# EAGLE board TSOC_GROVEY_GPIO (EAGLE 6.6.0)
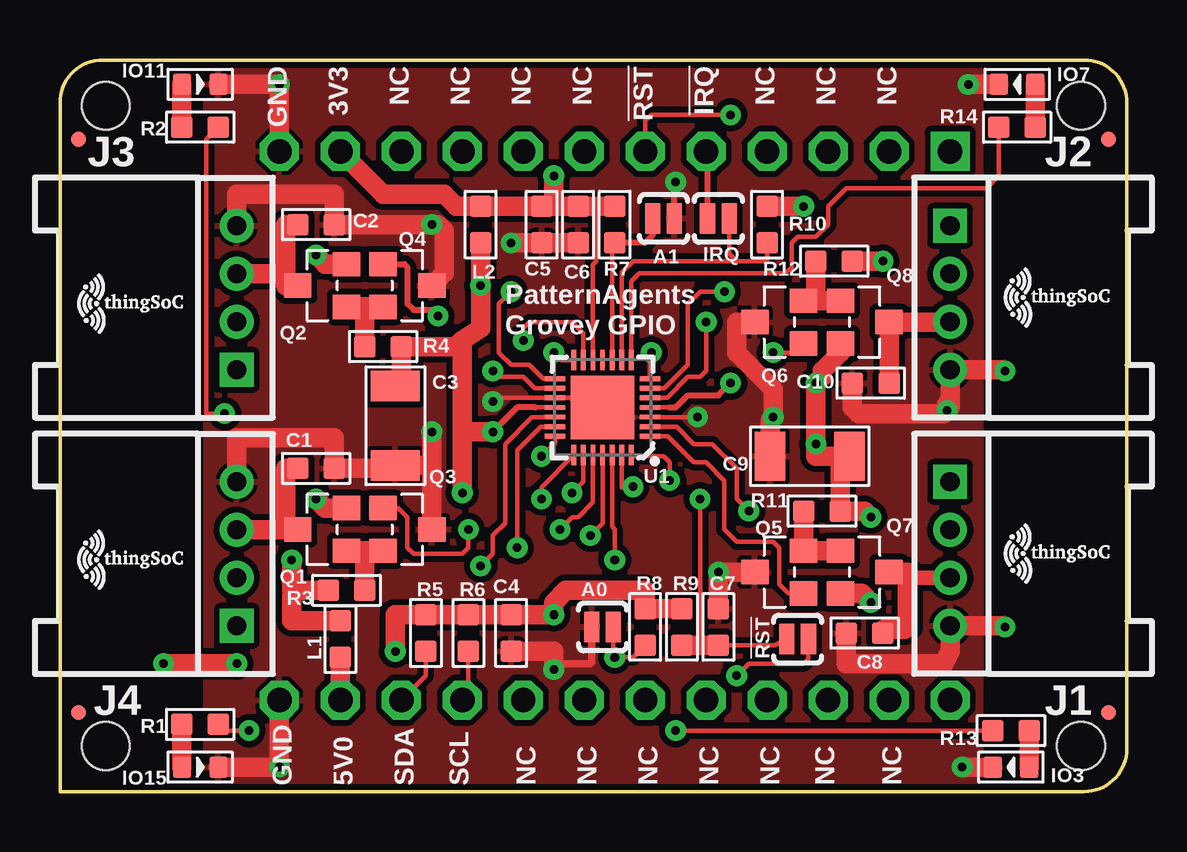
[diagram p0: board, top side]
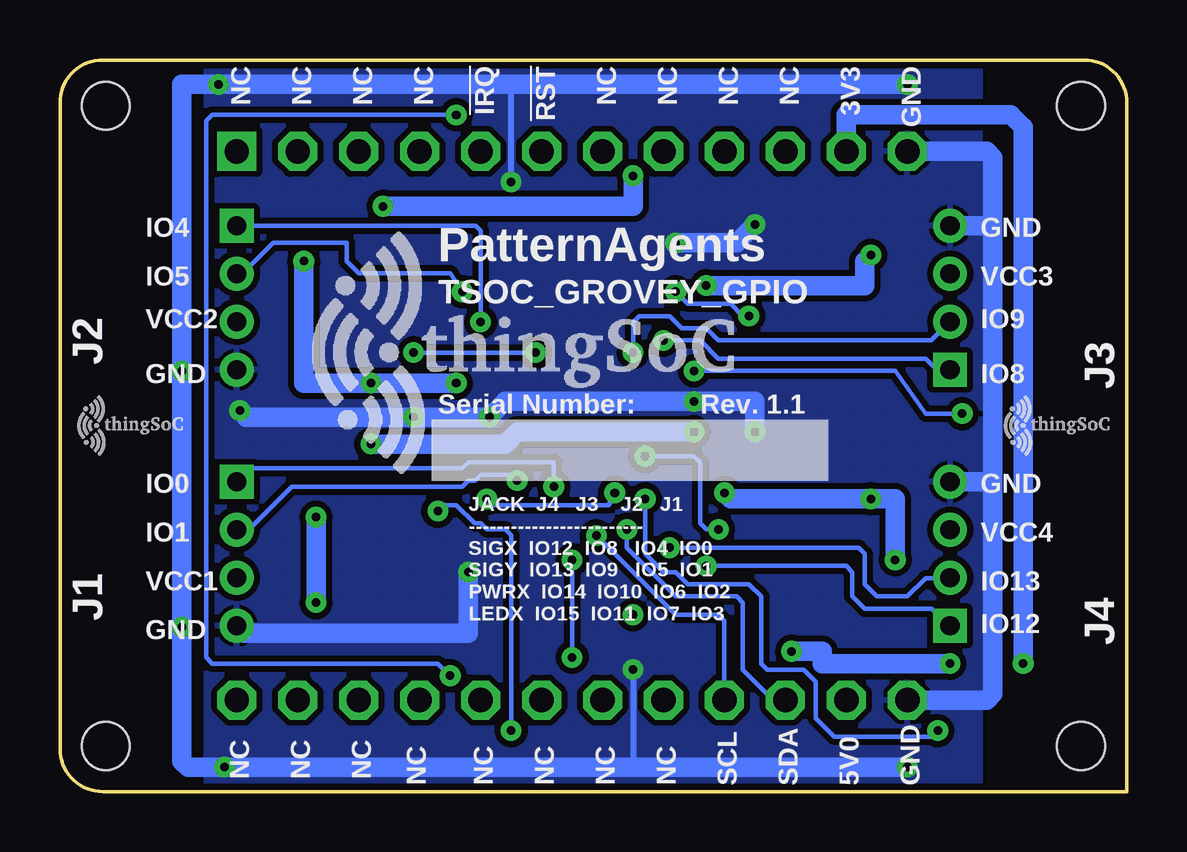
[diagram p1: board, bottom side, seen from below]

Size 44.45 x 30.48 mm. Coordinates in mm from the lower left corner, seen from the top.
Copper layers (1*16): Top 0.035mm / dielectric 1.5mm / Bottom 0.035mm
Design rules "PatternAgents_7mil": minimum track width 7mil, minimum drill 14mil, track to track 7mil, track to pad 7mil, pad to pad 7mil, via to via 7mil, smd to smd 7mil, copper to edge 7mil, drill to drill 7mil, minimum pad ring 12mil, minimum via ring 10mil, stop-mask expansion 4mil, vias tented up to drill 25mil, thermal gap 7mil

## Footprints (pad centres in the part's own frame; a part is rotated, then mirrored left to right if it is on the bottom)
JMP-2-NO = smd 0.635 x 1.27: 1 -0.45,0; 2 0.45,0
C0603 = smd 0.889 x 0.889: 1 0,0.762; 2 0,-0.762
C1206 = smd 1.27 x 2.032: 1 -1.651,0; 2 1.651,0
MICRO-FIDUCIAL = smd 0.635 x 0.635: 1 0,0
LED-0603 = smd 0.762 x 0.889: + -0.762,0; - 0.762,0
HW4-2.0-90D = drill 0.8 pad 1.27 square: 1 -3,0 | drill 0.8 pad 1.27: 2 -1,0; 3 1,0; 4 3,0
L0603 = smd 0.889 x 0.889: 1 -0.762,0; 2 0.762,0
SOT-23 = smd 1.016 x 1.143: 1 -0.889,-1.016; 2 0.889,-1.016; 3 0,1.016
R0603 = smd 0.889 x 0.889: 1 0,0.762; 2 0,-0.762
TSOC-BB-S24 = drill 1.016 square: 1B -11.43,11.43 | drill 1.016 octagon: 1C 11.43,11.43; 2B -11.43,8.89; 2C 11.43,8.89; 3B -11.43,6.35; 3C 11.43,6.35; 4B -11.43,3.81; 4C 11.43,3.81; 5B -11.43,1.27; 5C 11.43,1.27; 6B -11.43,-1.27; 6C 11.43,-1.27; 7B -11.43,-3.81; 7C 11.43,-3.81; 8B -11.43,-6.35; 8C 11.43,-6.35; 9B -11.43,-8.89; 9C 11.43,-8.89; 10B -11.43,-11.43; 10C 11.43,-11.43; 11B -11.43,-13.97; 11C 11.43,-13.97; 12B -11.43,-16.51; 12C 11.43,-16.51
QFN-28 = smd 0.85 x 0.2: 1 -1.975,1.2; 2 -1.975,0.8; 3 -1.975,0.4; 4 -1.975,0; 5 -1.975,-0.4; 6 -1.975,-0.8; 7 -1.975,-1.2; 15 1.975,-1.2; 16 1.975,-0.8; 17 1.975,-0.4; 18 1.975,0; 19 1.975,0.4; 20 1.975,0.8; 21 1.975,1.2 | smd 0.2 x 0.85: 8 -1.2,-1.975; 9 -0.8,-1.975; 10 -0.4,-1.975; 11 0,-1.975; 12 0.4,-1.975; 13 0.8,-1.975; 14 1.2,-1.975; 22 1.2,1.975; 23 0.8,1.975; 24 0.4,1.975; 25 0,1.975; 26 -0.4,1.975; 27 -0.8,1.975; 28 -1.2,1.975 | smd 2.65 x 2.65: 29 0,0
TSOC-BB-BRD-DIM = hole 2: 13.335,16.891; -13.335,16.891; 13.335,-23.749; -13.335,-23.749

## Placement (x,y rotation side)
!RST  NO  [JMP-2-NO]  30.73,6.35 0 top
$$U$4  TSOC-LOGO-SMALL  [TSOC-LOGO-SML]  40.13,9.91 0 top
$$U$5  TSOC-LOGO-SMALL  [TSOC-LOGO-SML]  40.13,20.57 0 top
A0  NO  [JMP-2-NO]  22.61,6.86 0 top
A1  NO  [JMP-2-NO]  25.15,23.88 180 top
C1  1uf  [C0603]  10.67,13.46 270 top
C2  1uf  [C0603]  10.67,23.62 270 top
C3  100uf  [C1206]  13.97,15.24 90 top
C4  1uf  [C0603]  18.8,6.6 180 top
C5  100nf  [C0603]  20.07,23.62 0 top
C6  1uf  [C0603]  21.59,23.62 180 top
C7  100nf  [C0603]  27.43,6.86 180 top
C8  1uf  [C0603]  33.53,6.6 90 top
C9  100uf  [C1206]  31.24,13.97 0 top
C10  1uf  [C0603]  33.78,17.02 90 top
FID1  FIDUCIALUFIDUCIAL  [MICRO-FIDUCIAL]  0.76,3.3 0 top
FID2  FIDUCIALUFIDUCIAL  [MICRO-FIDUCIAL]  0.76,27.18 0 top
FID3  FIDUCIALUFIDUCIAL  [MICRO-FIDUCIAL]  43.69,3.3 0 top
FID4  FIDUCIALUFIDUCIAL  [MICRO-FIDUCIAL]  43.69,27.18 0 top
IO3  BLUE-0603  [LED-0603]  39.62,1.02 180 top
IO7  RED-0603  [LED-0603]  39.88,29.46 180 top
IO11  GREEN-0603  [LED-0603]  5.84,29.46 0 top
IO15  YELLOW-0603  [LED-0603]  5.84,1.02 0 top
IRQ  NO  [JMP-2-NO]  27.43,23.88 0 top
J1  4P-2.0-90D  [HW4-2.0-90D]  37.08,9.91 270 top
J2  4P-2.0-90D  [HW4-2.0-90D]  37.08,20.57 270 top
J3  4P-2.0-90D  [HW4-2.0-90D]  7.37,20.57 90 top
J4  4P-2.0-90D  [HW4-2.0-90D]  7.37,9.91 90 top
L1  120OHM-500MA  [L0603]  11.68,6.35 270 top
L2  DNP  [L0603]  17.53,23.62 270 top
Q1  CJ2305  [SOT-23]  10.92,10.92 90 top
Q2  CJ2305  [SOT-23]  10.92,21.08 90 top
Q3  BSS138W-7-F  [SOT-23]  14.48,10.92 270 top
Q4  BSS138W-7-F  [SOT-23]  14.48,21.08 270 top
Q5  BSS138W-7-F  [SOT-23]  29.97,9.14 90 top
Q6  BSS138W-7-F  [SOT-23]  29.97,19.56 90 top
Q7  CJ2305  [SOT-23]  33.53,9.14 270 top
Q8  CJ2305  [SOT-23]  33.53,19.56 270 top
R1  1K 1/10W  [R0603]  5.84,2.79 90 top
R2  1K 1/10W  [R0603]  5.84,27.69 90 top
R3  47K  [R0603]  11.94,8.38 270 top
R4  47K  [R0603]  13.46,18.54 90 top
R5  10K 1/10W  [R0603]  15.24,6.6 180 top
R6  10K 1/10W  [R0603]  17.02,6.6 180 top
R7  10K 1/10W  [R0603]  23.11,23.62 180 top
R8  10K 1/10W  [R0603]  24.38,6.86 180 top
R9  10K 1/10W  [R0603]  25.91,6.86 180 top
R10  10K 1/10W  [R0603]  29.46,23.62 180 top
R11  47K  [R0603]  31.75,11.68 90 top
R12  47K  [R0603]  32.26,22.1 90 top
R13  1K 1/10W  [R0603]  39.62,2.54 270 top
R14  1K 1/10W  [R0603]  39.88,27.69 270 top
TSOC  TSOC-24-BB  [TSOC-BB-S24]  25.65,15.24 270 top
U1  SX1509  [QFN-28]  22.61,16 180 top
U$1  TSOC-LOGO-SMALL  [TSOC-LOGO-SML]  1.52,9.65 0 top
U$2  TSOC-LOGO-SMALL  [TSOC-LOGO-SML]  1.52,20.32 0 top
U$3  TSOC-PCB-SINGLE  [TSOC-BB-BRD-DIM]  25.65,15.24 270 top
U$100  TSOC-LOGO-SMALL  [TSOC-LOGO-SML]  4.32,15.24 0 bottom
U$101  TSOC-LOGO-LRG  [TSOC-LOGO-LRG]  30.73,18.29 0 bottom
U$102  TSOC-LOGO-SMALL  [TSOC-LOGO-SML]  42.93,15.24 0 bottom

## Library data of the parts
!RST A0 A1 IRQ = scratch-ProtoPads; BOM: EXCLUDE
$$U$4 $$U$5 TSOC U$1-U$3 U$100-U$102 = thingSoC
C1 C2 C4 C6 C8 C10 = Seeed-Capacitor-2016; MPN: CC0603KRX7R8BB105
C3 C9 = Seeed-Capacitor-2016; MPN: GRM31CR60J107ME39L
C5 C7 = Seeed-Capacitor-2016; MPN: CC0603KRX7R9BB104
FID1-FID4 = TSOC-ESP8266-BASE
IO3 = Seeed-LED-2016; MPN: 19-217-BHC-ZL1M2RY-3T
IO7 = Seeed-LED-2016; MPN: 19-217-R6C-AL1M2VY-3T
IO11 = Seeed-LED-2016; MPN: 19-217-G7C-AN1P2-3T
IO15 = Seeed-LED-2016; MPN: 19-217-Y5C-AM1N1VY-3T
J1-J4 = Seeed-Connector -2016
L1 L2 = Seeed-Inductor-2016; MPN: BLM18AG121SN1D
Q1 Q2 Q7 Q8 = Seeed-Transistor-2016; MPN: CJ2305
Q3-Q6 = Seeed-Transistor-2016; MPN: BSS138W-7-F
R1 R2 R13 R14 = Seeed-Resistor-2016; MPN: RC0603JR-071KL
R3 R4 R11 R12 = Seeed-Resistor-2016; MPN: RC0603JR-0747KL
R5-R10 = Seeed-Resistor-2016; MPN: RC0603JR-0710KL
U1 = SparkFun-DigitalIC; PROD_ID: IC-11311

## Nets
3V3: C4.2 C5.1 C6.2 L2.1 R5.2 R6.2 R7.2 R8.2 R9.2 R10.2 TSOC.11B U1.12
5V0: L1.2 TSOC.11C
!INT: IRQ.2 R10.1 U1.9
!RST: !RST.1 C7.1 R9.1 U1.23
!XINT: IRQ.1 TSOC.5B
!XRST: !RST.2 TSOC.6B
A0: A0.2 R8.1 U1.26
A1: A1.2 R7.1 U1.10
GND: A0.1 A1.1 C1.1 C2.1 C3.1 C4.1 C5.2 C6.1 C7.2 C8.1 C9.1 C10.1 IO3.- IO7.- IO11.- IO15.- J1.4 J2.4 J3.4 J4.4 Q3.3 Q4.3 Q5.3 Q6.3 TSOC.12B TSOC.12C U1.3 U1.17 U1.29
IO0: J1.1 U1.27
IO1: J1.2 U1.28
IO2: Q5.1 U1.1
IO3: R13.2 U1.2
IO4: J2.1 U1.5
IO5: J2.2 U1.6
IO6: Q6.1 U1.7
IO7: R14.2 U1.8
IO8: J3.1 U1.13
IO9: J3.2 U1.14
IO10: Q4.1 U1.15
IO11: R2.2 U1.16
IO12: J4.1 U1.19
IO13: J4.2 U1.20
IO14: Q3.1 U1.21
IO15: R1.2 U1.22
LED1: IO11.+ R2.1
LED2: IO7.+ R14.1
LED3: IO3.+ R13.1
LED4: IO15.+ R1.1
N$1: Q2.1 Q4.2 R4.1
N$2: Q1.1 Q3.2 R3.1
N$3: Q5.2 Q7.1 R11.1
N$4: Q6.2 Q8.1 R12.1
OSC: U1.11
SCL: R6.1 TSOC.9C U1.25
SDA: R5.1 TSOC.10C U1.24
VCC: C3.2 C9.2 L1.1 L2.2 Q1.2 Q2.2 Q7.2 Q8.2 R3.2 R4.2 R11.2 R12.2 U1.4 U1.18
VCC1: C8.2 J1.3 Q7.3
VCC2: C10.2 J2.3 Q8.3
VCC3: C2.2 J3.3 Q2.3
VCC4: C1.2 J4.3 Q1.3

## Tracks (layer width: path | path; a pad name or v marks a point on that pad's centre or on a via)
3V3  (via drill 0.36)
  Top 0.178: 22.21,24.28 22.35,24.28 | 22.35,24.28 23.01,24.28 R7.2 | U1.12 22.21,21.95 22.35,22.1 22.35,24.28
  Top 0.813: R9.2 R8.2 24.38,8.38 21.08,8.38 20.57,7.87 v20.57,7.37 C4.2 R6.2 R5.2 13.97,7.37 v13.97,5.84 | R10.2 v30.99,24.38 | TSOC.11B 13.46,24.89 16,24.89 16.51,24.38 L2.1 C5.1 20.57,24.38 | v20.57,25.65 20.57,24.38 | 20.57,24.38 C6.2 R7.2 | v4.32,5.33 v7.37,5.33
  Bottom 0.813: TSOC.11B 11.68,28.19 4.83,28.19 4.32,27.69 v4.32,5.33 | v30.99,24.38 20.57,24.38 v20.57,25.65 | v13.97,5.84 12.7,5.84 12.7,5.33 v7.37,5.33
5V0
  Top 0.813: TSOC.11C L1.2
!INT
  Top 0.178: U1.9 23.41,21.63 23.88,22.1 28.19,22.1 | 28.19,22.1 29.46,22.1 R10.1 | IRQ.2 27.88,22.41 28.19,22.1
!RST  (via drill 0.36)
  Top 0.178: U1.23 21.81,12.92 v21.34,12.45 | R9.1 26.42,6.1 26.67,6.35 v26.67,12.19 | C7.1 29.78,6.1 !RST.1
  Top 0.813: C7.1 R9.1
  Bottom 0.178: v21.34,12.45 21.59,11.94 26.42,11.94 v26.67,12.19
!XINT
  Top 0.254: IRQ.1 26.98,26.61 TSOC.5B
!XRST  (via drill 0.36)
  Top 0.178: !RST.2 31.18,5.53 30.99,5.33 28.7,5.33 v28.19,4.83 | v27.94,28.19 24.64,28.19 24.38,27.94 TSOC.6B
  Bottom 0.178: v28.19,4.83 28.7,5.33 38.1,5.33 38.35,5.59 38.35,27.94 38.1,28.19 v27.94,28.19
A0  (via drill 0.36)
  Top 0.178: U1.26 23.01,11.03 23.11,10.92 v23.11,9.65 | 23.11,7.05 A0.2 23.06,5.65 v23.11,5.59 23.88,5.59 R8.1
  Bottom 0.178: v23.11,5.59 v23.11,9.65
A1
  Top 0.178: U1.10 23.01,22.75 R7.1
  Top 0.254: A1.2 24.7,23.17 24.38,22.86 R7.1
GND  (via drill 0.36)
  Top 0.178: 23.01,15.6 U1.29 | 22.61,15.6 22.61,15.75 | 22.61,15.75 U1.29 | 22.75,15.6 22.61,15.75 | v18.03,16.26 18.18,16.4 U1.17 22.21,16.4 22.23,16.36 22.58,16 U1.29 | U1.3 v26.56,15.6 | U1.29 23.11,16 23.62,15.49
  Top 0.254: A1.1 25.6,25.34 v25.65,25.4
  Top 0.305: A0.1 22.16,5.39 22.1,5.33 20.83,5.33 v20.57,5.08
  Top 0.813: IO7.- v37.85,29.46 | IO11.- v9.14,29.46 TSOC.12B | v15.49,14.99 15.49,13.72 | 15.49,13.72 Q3.3 | IO15.- v9.14,1.02 TSOC.12C | J3.4 7.37,24.89 11.43,24.89 C2.1 v15.49,23.62 15.75,23.62 16,23.37 16,21.59 Q4.3 | J4.4 7.37,14.73 11.43,14.73 C1.1 13.84,13.46 C3.1 15.37,13.59 15.49,13.72 | v18.8,22.86 C5.2 C6.1 | Q5.3 v27.43,9.14 C7.2 | v39.37,17.53 39.32,17.57 J2.4 37.08,16.26 | v39.37,6.86 39.32,6.91 J1.4 37.08,5.84 36.83,5.33 32.77,5.33 C8.1 | C10.1 33.02,16 33.27,15.75 36.83,15.75 v36.96,15.88 | v36.96,15.88 37.08,16 37.08,16.26 | v36.96,15.88 36.96,16.13 37.08,16.26 | IO3.- v37.59,1.02 | C9.1 29.59,15.47 v29.72,15.6 29.72,16.76 28.19,18.29 28.19,19.56 Q6.3 | C4.1 20.57,5.84 v20.57,5.08
  Bottom 0.254: v20.57,5.08 20.57,1.02 | 25.91,29.46 28.45,29.46 | v25.65,25.4 25.65,29.46
  Bottom 0.813: v9.14,29.46 25.65,29.46 25.91,29.46 v37.85,29.46 | v9.14,1.02 20.57,1.02 v37.59,1.02 39.12,1.02 39.37,1.27 v39.37,6.86 v39.37,17.53 39.37,29.46 v37.85,29.46 | 5.59,12.95 5.59,23.37 | 5.59,23.37 5.59,26.42 5.84,26.67 TSOC.12B | J3.4 5.79,23.57 5.59,23.37 | J4.4 5.64,12.91 5.59,12.95 | v37.85,29.46 36.58,29.46 | v18.03,16.26 15.49,16.26 v15.49,14.99 | v18.8,22.86 16.26,22.86 v15.49,23.62 | v27.43,9.14 27.43,6.6 36.78,6.6 J1.4 37.04,6.86 | 5.59,12.95 5.59,4.06 5.84,3.81 TSOC.12C | v36.96,15.88 36.68,15.6 v29.72,15.6 v26.56,15.6 25.91,16.26 18.29,16.26
  pour Top (isolate 0.254, rank 2, hatched): 6.1,0 6.1,30.48 38.35,30.48 38.35,0
  pour Bottom (isolate 0.254, rank 2, hatched): 6.1,0 6.1,30.48 38.35,30.48 38.35,0
IO0  (via drill 0.36)
  Top 0.178: 23.62,12.7 v23.88,12.7 23.41,12.66 U1.27
  Bottom 0.178: J1.1 37.08,13.21 36.83,13.46 27.69,13.46 27.43,13.72 23.88,13.72 v23.88,12.7
IO1  (via drill 0.36)
  Top 0.178: v25.4,12.95 25.4,13.72 25.15,13.97 23.86,13.97 U1.28
  Bottom 0.178: J1.2 36.59,10.91 34.8,12.7 27.69,12.7 27.43,12.95 27.18,12.95 26.92,13.21 25.65,13.21 v25.4,12.95
IO2
  Top 0.178: Q5.1 30.35,8.26 29.97,8.64 29.97,10.16 29.72,10.41 28.19,10.41 27.69,10.92 27.69,12.95 26.92,13.72 26.42,13.72 25.33,14.8 U1.1
IO3  (via drill 0.36)
  Top 0.178: R13.2 v25.65,2.54 | v28.7,11.68 28.19,12.19 28.19,13.46 27.18,14.48 26.42,14.48 25.69,15.2 U1.2
  Bottom 0.178: v25.65,2.54 25.65,10.67 25.91,10.92 26.67,10.92 26.92,11.18 27.18,11.18 27.94,11.94 28.45,11.94 v28.7,11.68
IO4  (via drill 0.36)
  Top 0.178: v26.92,19.56 26.92,17.53 26.67,17.27 26.16,17.27 25.29,16.4 U1.5
  Bottom 0.178: J2.1 27.13,23.57 26.92,23.37 v26.92,19.56
IO5  (via drill 0.36)
  Top 0.178: U1.6 25.18,16.8 26.16,17.78 26.16,20.32 26.67,20.83 v27.69,20.83
  Bottom 0.178: v27.69,20.83 28.18,21.57 28.19,21.59 32,21.59 32.51,22.1 32.51,22.86 35.56,22.86 36.85,21.57 J2.2
IO6  (via drill 0.36)
  Top 0.178: U1.7 24.58,18.48 v24.64,18.29 | 30.86,18.54 Q6.1 30.61,18.29 v29.72,18.29
  Bottom 0.178: v24.64,18.29 v29.72,18.29
IO7
  Top 0.178: R14.2 39.12,25.65 38.61,25.15 32.77,25.15 32,24.38 32,23.62 31.5,23.11 30.73,23.11 30.48,22.86 30.48,21.84 30.23,21.59 24.13,21.59 23.81,21.27 U1.8
IO8  (via drill 0.36)
  Top 0.178: U1.13 21.81,19.09 21.34,19.56 19.56,19.56 19.3,19.3 v19.3,18.8
  Bottom 0.178: J3.1 7.92,17.57 8.38,18.03 17.02,18.03 17.78,18.8 v19.3,18.8
IO9  (via drill 0.36)
  Top 0.178: U1.14 20.89,17.98 v20.57,18.29
  Bottom 0.178: v20.57,18.29 20.57,19.56 20.32,19.81 19.05,19.81 18.54,19.3 17.53,19.3 17.02,18.8 8.14,18.8 J3.2
IO10  (via drill 0.36)
  Top 0.178: U1.15 20.14,17.2 19.56,17.78 18.8,17.78 18.29,18.29 18.29,20.32 v18.8,20.83
  Top 0.254: Q4.1 14.35,21.97 14.48,21.84 14.48,20.32 14.73,20.07 15.49,20.07 v15.75,19.81
  Bottom 0.178: v15.75,19.81 16,19.81 16.51,20.32 18.29,20.32 v18.8,20.83
IO11  (via drill 0.36)
  Top 0.178: v6.86,15.75 6.1,15.75 6.1,27.18 R2.2 | U1.16 19.77,16.8 19.3,17.27 18.29,17.27 v18.03,17.53
  Bottom 0.178: v18.03,17.53 9.65,17.53 8.38,15.75 v6.86,15.75
IO12  (via drill 0.36)
  Top 0.178: U1.19 19.67,15.6 18.54,14.48 18.54,11.18 18.03,10.67 18.03,9.91 v17.53,9.4
  Bottom 0.178: v17.53,9.4 11.68,9.4 11.43,9.14 11.43,8.13 10.92,7.62 8.13,7.62 7.46,6.95 | 7.41,6.86 7.41,6.91 7.46,6.95 | J4.1 7.47,6.93 7.46,6.95
IO13  (via drill 0.36)
  Top 0.178: v19.05,10.16 19.05,14.22 20.03,15.2 U1.20
  Bottom 0.178: v19.05,10.16 11.18,10.16 10.92,9.91 10.92,8.64 10.41,8.13 9.14,8.13 8.38,8.89 7.38,8.89 J4.2
IO14  (via drill 0.36)
  Top 0.178: U1.21 20.63,14.54 v20.07,13.97 | 13.59,11.81 14.1,11.81 14.48,11.43 14.48,10.16 14.73,9.91 16.76,9.91 17.02,10.16 v17.02,10.92
  Top 0.254: Q3.1 13.59,11.81
  Bottom 0.178: v20.07,13.97 18.03,13.97 17.78,13.72 17.78,11.18 17.53,10.92 v17.02,10.92
IO15  (via drill 0.36)
  Top 0.178: v20.07,12.19 20.07,12.69 U1.22 | v7.87,2.54 6.86,2.54 R1.2
  Bottom 0.178: v20.07,12.19 20.07,9.91 19.3,9.14 18.8,9.14 18.29,8.64 15.75,8.64 15.24,8.13 15.24,5.33 14.99,5.08 13.46,5.08 12.95,4.57 12.95,3.05 12.19,2.29 8.13,2.29 v7.87,2.54
LED1
  Top 0.813: IO11.+ R2.1
LED2
  Top 0.813: IO7.+ R14.1
LED3
  Top 0.813: R13.1 IO3.+
LED4
  Top 0.813: IO15.+ R1.1
N$1
  Top 0.813: Q2.1 12.7,20.19 | 12.7,20.19 Q4.2 | R4.1 12.7,20.19
N$2
  Top 0.254: 12.7,10.03 12.06,10.03 11.94,10.16
  Top 0.813: Q1.1 12.7,10.03 | 12.7,10.03 Q3.2 | 12.7,10.03 R3.1
N$3
  Top 0.813: Q7.1 Q5.2 R11.1
N$4
  Top 0.813: Q6.2 31.5,20.45 | 31.5,20.45 Q8.1 | R12.1 31.5,20.45
SCL  (via drill 0.36)
  Top 0.178: U1.25 22.61,11.18 v22.1,10.67 | R6.1 17.02,4.06 TSOC.9C
  Bottom 0.178: v22.1,10.67 18.8,7.37 17.02,7.37 16.76,7.11 TSOC.9C
SDA  (via drill 0.36)
  Top 0.178: U1.24 22.21,12.05 21.59,11.43 21.34,11.43 v20.83,10.92 | R5.1 15.24,4.83 TSOC.10C
  Bottom 0.178: v20.83,10.92 20.83,10.16 18.8,8.13 16.26,8.13 16,7.87 16,5.08 14.73,3.81 TSOC.10C
VCC  (via drill 0.36)
  Top 0.178: U1.18 19.81,16 | U1.4 25.4,16
  Top 0.254: 19.81,16 19.05,16 v18.03,14.99 | 25.4,16 25.65,16 26.16,16.51 27.43,16.51 v27.94,17.02
  Top 0.813: Q1.2 11.05,11.81 v10.67,12.19 | Q2.2 11.05,21.97 v10.67,22.35 | v16.76,12.45 16.76,15.24 | 16.76,15.24 16.76,18.8 | L2.2 v17.53,21.08 17.53,19.3 16.76,18.8 | 16.76,18.8 16.51,18.54 R4.2 14.22,17.02 14.1,16.89 C3.2 | v9.65,9.65 9.65,8.38 9.91,8.38 | R3.2 9.91,8.38 | Q7.2 33.4,8.26 v33.78,7.87 | v33.78,11.43 33.53,11.68 R11.2 32.51,13.59 C9.2 31.5,13.97 v31.5,14.48 v31.5,17.02 31.75,17.27 31.75,17.53 32.51,18.29 Q8.2 | 16.76,15.24 17.02,14.99 v18.03,14.99 | R12.2 v34.29,22.1 | L1.1 9.65,7.11 9.65,8.13 9.91,8.38
  Bottom 0.813: v10.67,22.35 10.92,22.1 10.92,21.08 v17.53,21.08 | v9.65,9.65 9.65,12.19 v10.67,12.19 16.51,12.19 v16.76,12.45 | v33.78,7.87 v33.78,11.43 | v27.94,17.02 v31.5,17.02 34.29,17.02 v34.29,22.1 | v18.03,14.99 25.4,14.99 25.91,14.48 v31.5,14.48
VCC1
  Top 0.178: 34.31,6.76 C8.2
  Top 0.61: J1.3 35.31,8.91 35.31,9.14
  Top 0.813: Q7.3 35.31,9.14 35.31,6.86 35.2,6.76 34.31,6.76
VCC2
  Top 0.178: 36.98,19.56 J2.3
  Top 0.813: C10.2 Q8.3 36.98,19.56 37.07,19.56
VCC3
  Top 0.813: C2.2 9.4,23.62 9.4,21.59 | 9.4,21.59 9.4,21.08 Q2.3 | J3.3 9.38,21.57 9.4,21.59
VCC4
  Top 0.813: 9.4,10.91 9.89,10.91 Q1.3 | C1.2 9.4,13.46 9.4,10.91 | J4.3 9.4,10.91

## Text on the board
tPlace: GND | 3V3 | NC | NC | NC | NC | !RST | !IRQ | NC | NC | NC | PatternAgents | Grovey GPIO | GND | 5V0 | SDA | SCL | NC | NC | NC | NC | NC | NC | NC
bPlace: GND | 3V3 | NC | NC | NC | NC | !RST | !IRQ | NC | NC | NC | NC | GND | IO4 | PatternAgents | VCC3 | IO5 | TSOC_GROVEY_GPIO | IO9 | VCC2 | J2 | J3 | IO8 | GND | Rev. 1.1 | Serial Number: | GND | IO0 | VCC4 | IO1 | IO13 | VCC1 | IO12 | JACK J4 J3 J2 J1 / ------------------------- / SIGX IO12 IO8 IO4 IO0 / SIGY IO13 IO9 IO5 IO1 / PWRX IO14 IO10 IO6 IO2 / LEDX IO15 IO11 IO7 IO3 | J1 | J4 | GND | NC | NC | NC | GND | 5V0 | SDA | SCL | NC | NC | NC | NC | NC